# Altium PCB c8.pcbdoc
Units mil, origin at the board's own origin, x right, y up, seen from the top; angles counter-clockwise.
Board outline 3149.61 x 2598.43 mil, 2 copper layers (Top Layer, Bottom Layer); 16 components, 35 nets, 112 pads, 93 vias.
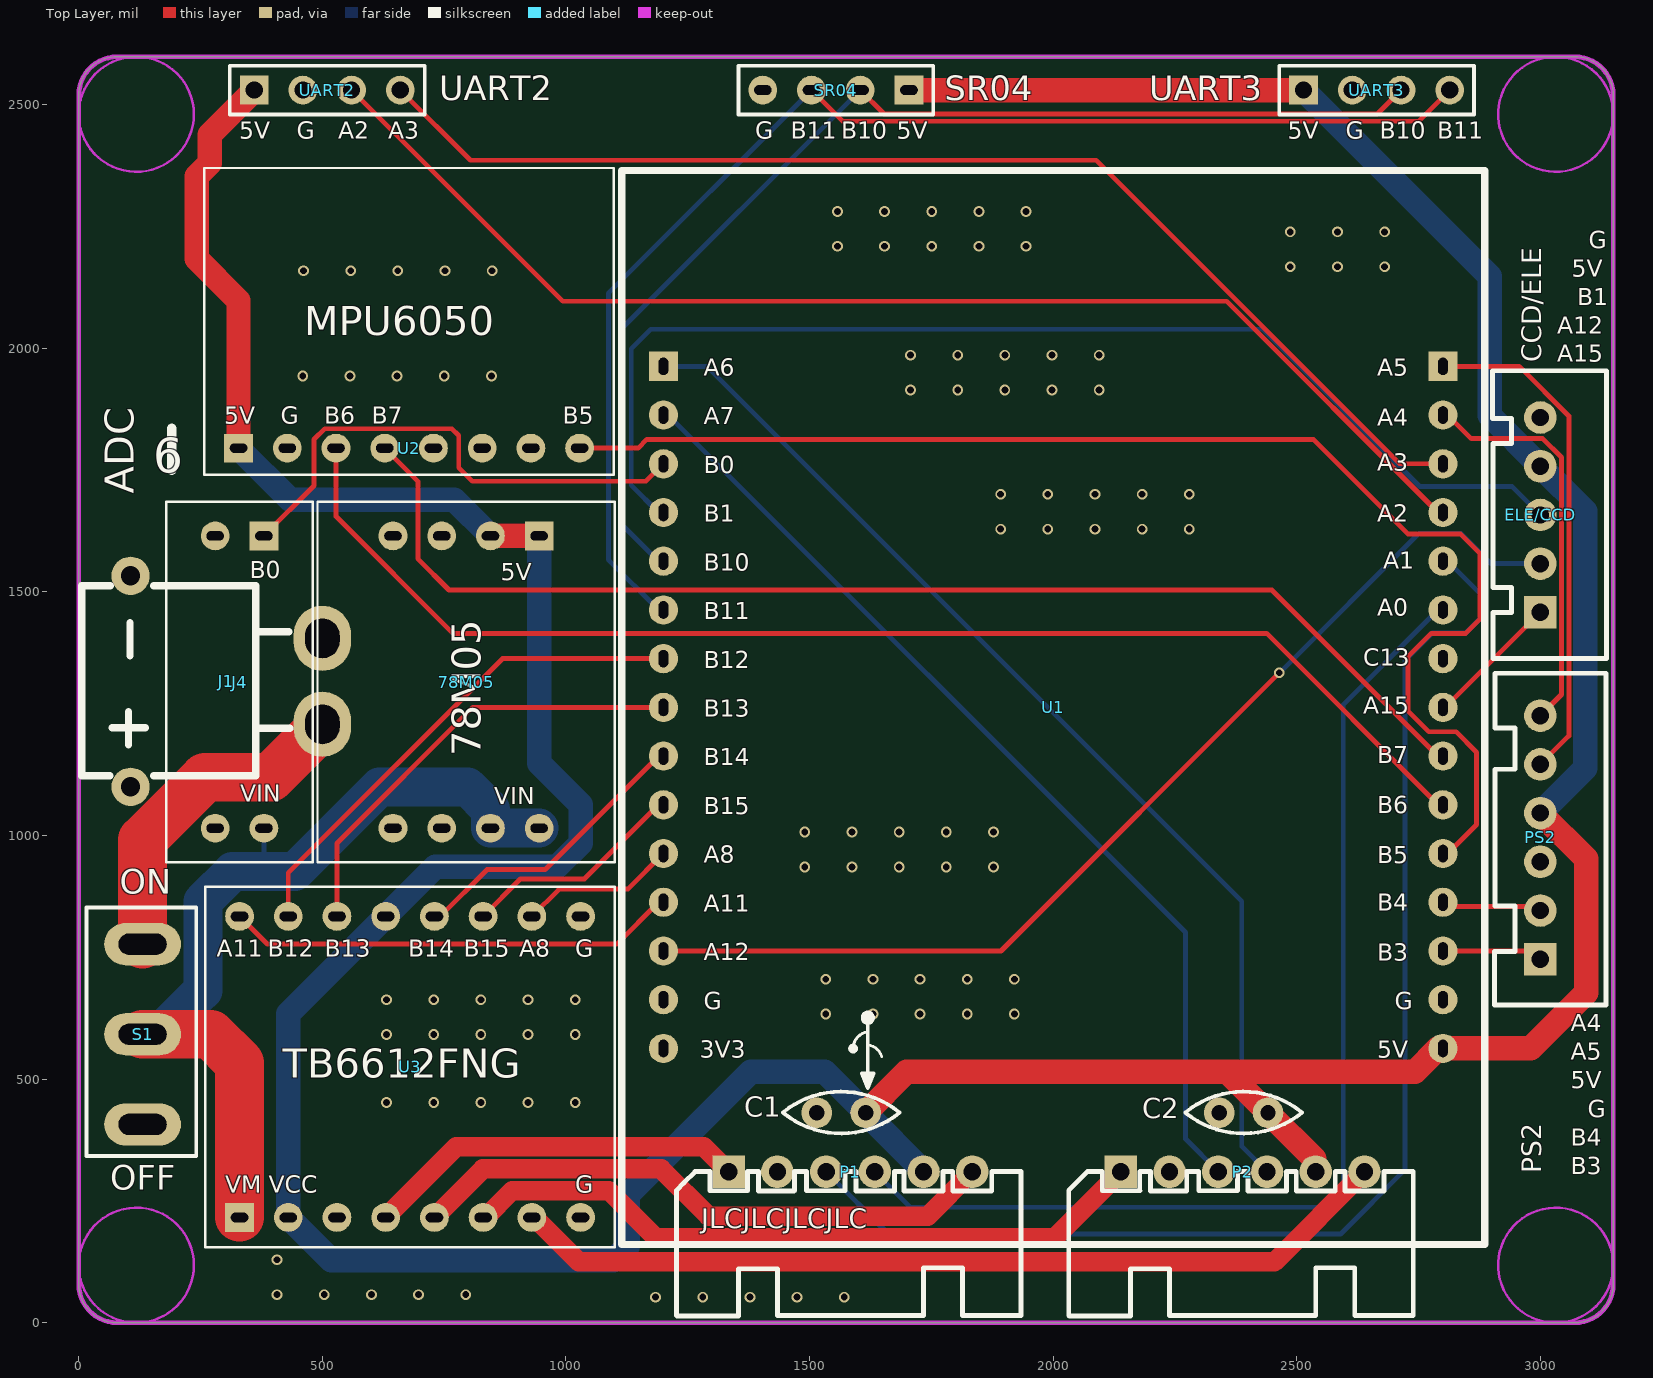
[diagram p0: Top Layer view]
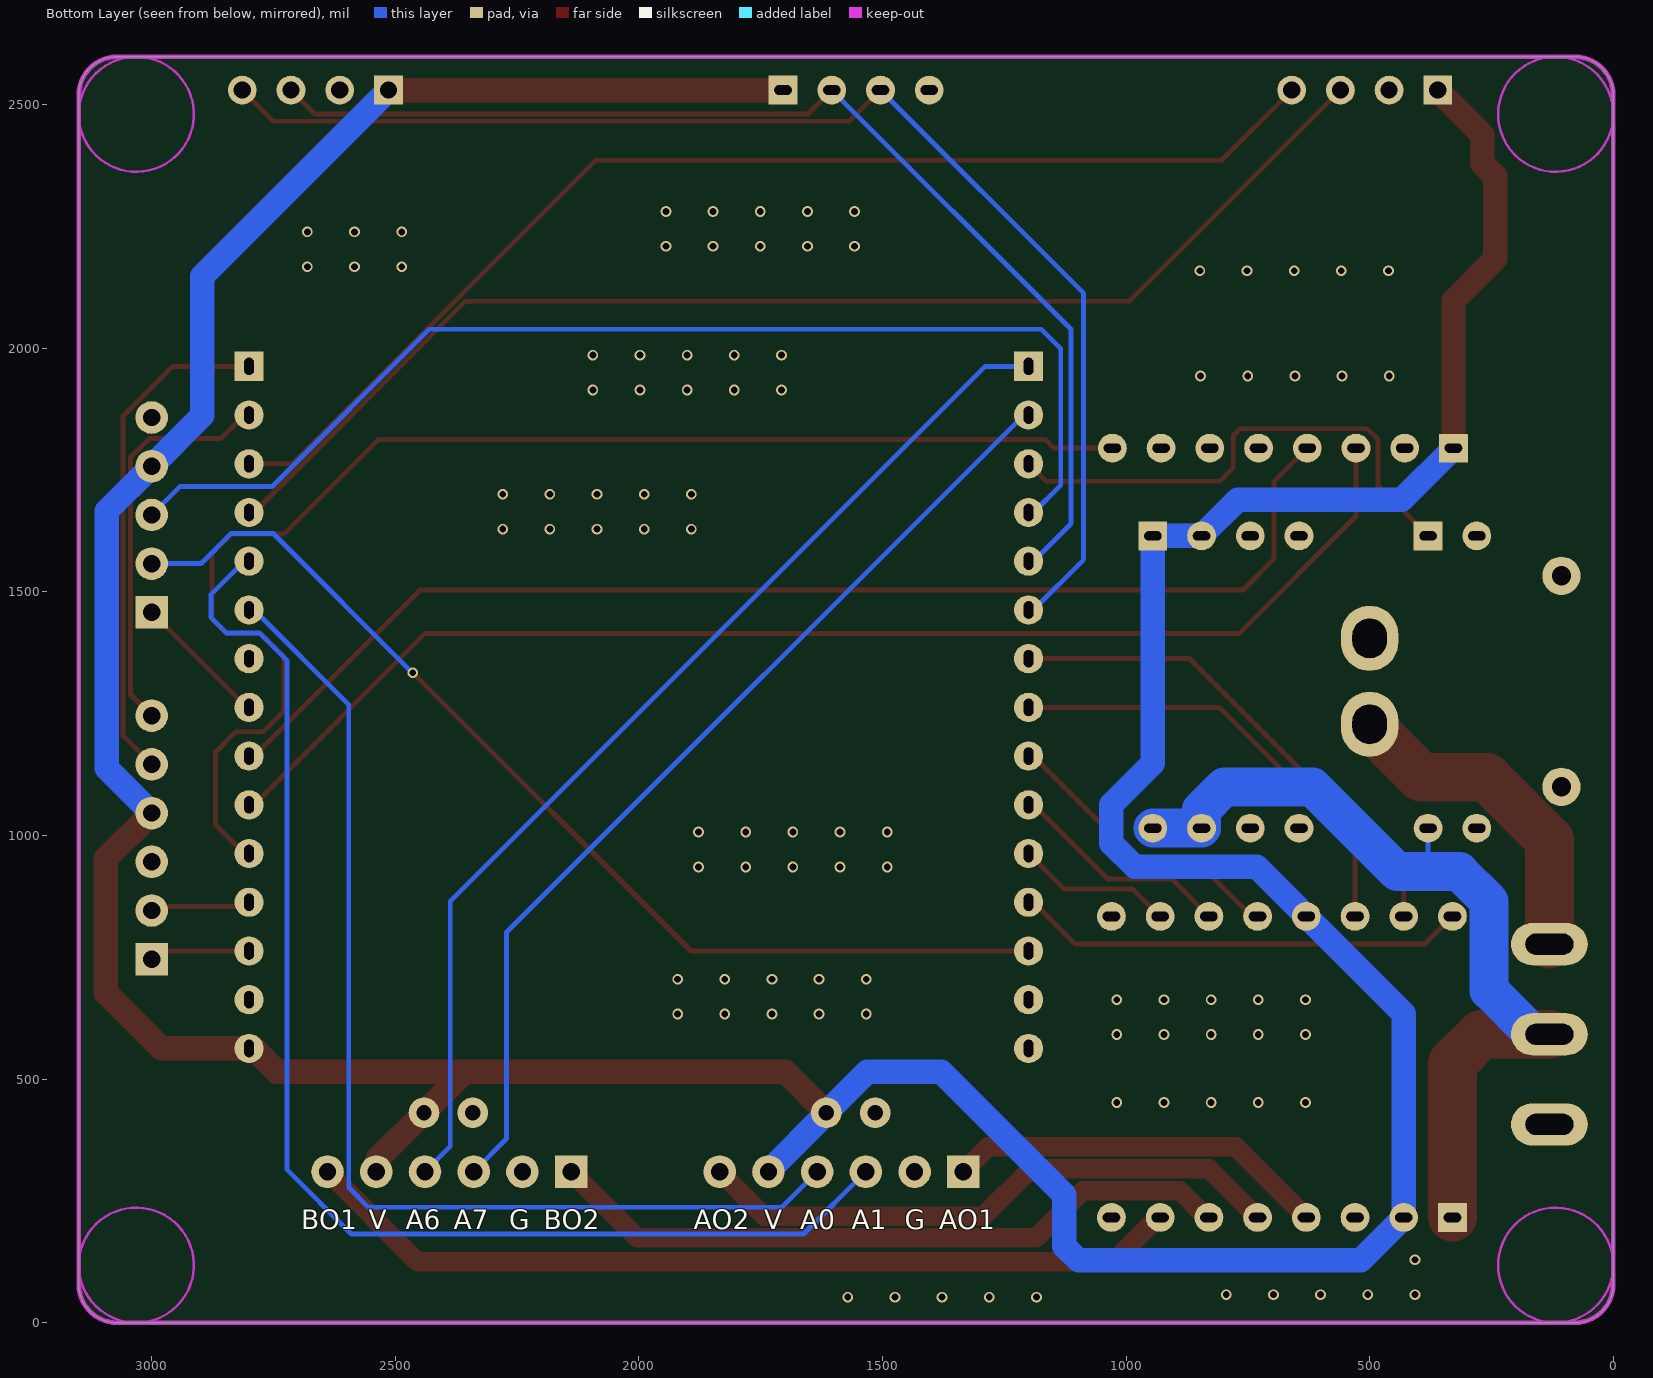
[diagram p1: Bottom Layer view, seen from below]

## Layer stack, top to bottom
Top Solder: solder mask 0.4, Solder Resist, Dk 3.5
Top Layer: signal copper 1.4
Dielectric 1: dielectric 12.6, FR-4, Dk 4.8
Bottom Layer: signal copper 1.4
Bottom Solder: solder mask 0.4, Solder Resist, Dk 3.5

## Board outline
0,78.74 0,2519.68 cw(c78.74,2519.68) 78.74,2598.43 3070.87,2598.43 cw(c3070.87,2519.68) 3149.61,2519.68 3149.61,78.74 cw(c3070.87,78.74) 3070.87,0 78.74,0 cw(c78.74,78.74)

## Design rules (kind name [scope] priority, off if disabled: settings)
AssemblyTestPointUsage [All] p0: scope1count=1 scope1_0_kind=Board scope1_0_value=Board scope2count=1 scope2_0_kind=Board scope2_0_value=Board commentlength=0
AssemblyTestpoint [All] p0: scope1count=1 scope1_0_kind=Board scope1_0_value=Board scope2count=1 scope2_0_kind=Board scope2_0_value=Board commentlength=0
Clearance Clearance_Polygon [All] p0 off: scope1count=1 scope1_0_kind=Board scope1_0_value=Board scope2count=1 scope2_0_kind=Board scope2_0_value=Board commentlength=48 gap=10 // Protel DXP Scope 1 Expression Was: InPolygon
Clearance [All] p0: scope1count=1 scope1_0_kind=Board scope1_0_value=Board scope2count=1 scope2_0_kind=Board scope2_0_value=Board commentlength=0 gap=5
Clearance Clearance_Polygon [InPolygon] p1: gap=10 ignorepadtopadclearanceinfootprint=FALSE
Clearance [All] p2: gap=5 ignorepadtopadclearanceinfootprint=FALSE except(0: Arc-Hole Track-Hole SMDPad-Hole THPad-Hole Via-Hole Fill-Hole Poly-Hole Region-Hole Text-Hole)
ComponentClearance [All] p0: scope1count=1 scope1_0_kind=Board scope1_0_value=Board scope2count=1 scope2_0_kind=Board scope2_0_value=Board commentlength=0 gap=10 collisioncheckmode=3
DiffPairsRouting [All] p0: scope1count=1 scope1_0_kind=Board scope1_0_value=Board scope2count=1 scope2_0_kind=Board scope2_0_value=Board commentlength=0
FabricationTestPointUsage [All] p0: scope1count=1 scope1_0_kind=Board scope1_0_value=Board scope2count=1 scope2_0_kind=Board scope2_0_value=Board commentlength=0 valid=0 allowmultiple=FALSE
FabricationTestpoint [All] p0: scope1count=1 scope1_0_kind=Board scope1_0_value=Board scope2count=1 scope2_0_kind=Board scope2_0_value=Board commentlength=0 side=3 testpointundercomponent=TRUE minsize=40 maxsize=100 preferedsize=60 minholesize=0 maxholesize=40 preferedholesize=32 testpointgrid=1
FanoutControl Fanout_BGA [All] p0 off: scope1count=1 scope1_0_kind=Board scope1_0_value=Board scope2count=1 scope2_0_kind=Board scope2_0_value=Board commentlength=69 // Protel DXP Scope 1 Expression Was: IsBGA   Fanout_BGA (Default Rule)
FanoutControl Fanout_LCC [All] p0 off: scope1count=1 scope1_0_kind=Board scope1_0_value=Board scope2count=1 scope2_0_kind=Board scope2_0_value=Board commentlength=69 // Protel DXP Scope 1 Expression Was: IsLCC   Fanout_LCC (Default Rule)
FanoutControl Fanout_SOIC [All] p0 off: scope1count=1 scope1_0_kind=Board scope1_0_value=Board scope2count=1 scope2_0_kind=Board scope2_0_value=Board commentlength=71 // Protel DXP Scope 1 Expression Was: IsSOIC   Fanout_SOIC (Default Rule)
FanoutControl Fanout_Small [All] p0 off: scope1count=1 scope1_0_kind=Board scope1_0_value=Board scope2count=1 scope2_0_kind=Board scope2_0_value=Board commentlength=84 // Protel DXP Scope 1 Expression Was: (CompPinCount < 5)   Fanout_Small (Default Rule)
FanoutControl Fanout_Default [All] p0: scope1count=1 scope1_0_kind=Board scope1_0_value=Board scope2count=1 scope2_0_kind=Board scope2_0_value=Board commentlength=30 // Fanout_Default (Default Rule)
Height [All] p0: scope1count=1 scope1_0_kind=Board scope1_0_value=Board scope2count=1 scope2_0_kind=Board scope2_0_value=Board commentlength=0
HoleSize [All] p0: scope1count=1 scope1_0_kind=Board scope1_0_value=Board scope2count=1 scope2_0_kind=Board scope2_0_value=Board commentlength=0 absolutevalues=TRUE maxlimit=200 minlimit=1 maxpercent=80.000 minpercent=20.000
HoleSize [All] p1: absolutevalues=TRUE maxlimit=200 minlimit=1 maxpercent=80.000 minpercent=20.000
HoleToHoleClearance [All] p0: scope1count=1 scope1_0_kind=Board scope1_0_value=Board scope2count=1 scope2_0_kind=Board scope2_0_value=Board commentlength=0
HoleToHoleClearance [All] p1: gap=5 allowstackedmicrovias=TRUE
LayerPairs [All] p0: scope1count=1 scope1_0_kind=Board scope1_0_value=Board scope2count=1 scope2_0_kind=Board scope2_0_value=Board commentlength=0 enforce=TRUE
MinimumSolderMaskSliver [All] p0: scope1count=1 scope1_0_kind=Board scope1_0_value=Board scope2count=1 scope2_0_kind=Board scope2_0_value=Board commentlength=0
MinimumSolderMaskSliver [All] p1: minsoldermaskwidth=5
NetAntennae [All] p0: scope1count=1 scope1_0_kind=Board scope1_0_value=Board scope2count=1 scope2_0_kind=Board scope2_0_value=Board commentlength=0
PasteMaskExpansion [All] p0: scope1count=1 scope1_0_kind=Board scope1_0_value=Board scope2count=1 scope2_0_kind=Board scope2_0_value=Board commentlength=0 expansion=5
PasteMaskExpansion [All] p1: expansion=5
PlaneClearance [All] p0: scope1count=1 scope1_0_kind=Board scope1_0_value=Board scope2count=1 scope2_0_kind=Board scope2_0_value=Board commentlength=0 clearance=10
PlaneClearance [All] p1: clearance=10
PlaneConnect [All] p0: scope1count=1 scope1_0_kind=Board scope1_0_value=Board scope2count=1 scope2_0_kind=Board scope2_0_value=Board commentlength=0 planeconnectstyle=Relief reliefexpansion=20 reliefentries=4 reliefconductorwidth=10 reliefairgap=5
PlaneConnect [All] p1: planeconnectstyle=Relief reliefexpansion=20 reliefentries=4 reliefconductorwidth=10 reliefairgap=5
PolygonConnect [All] p0: scope1count=1 scope1_0_kind=Board scope1_0_value=Board scope2count=1 scope2_0_kind=Board scope2_0_value=Board commentlength=0 connectstyle=Relief reliefconductorwidth=10 reliefentries=4 polygonreliefangle="90 Angle"
PolygonConnect PolygonConnect_J1 [All] p0 off: scope1count=1 scope1_0_kind=Board scope1_0_value=Board scope2count=1 scope2_0_kind=Board scope2_0_value=Board commentlength=78 connectstyle=Direct reliefconductorwidth=20 reliefentries=4 polygonreliefangle="90 Angle" // Protel DXP Scope 1 Expression Was: InComponent('J1')  OR InComponent('U3')
PolygonConnect PolygonConnect_Via [All] p0 off: scope1count=1 scope1_0_kind=Board scope1_0_value=Board scope2count=1 scope2_0_kind=Board scope2_0_value=Board commentlength=61 connectstyle=Direct reliefconductorwidth=10 reliefentries=4 polygonreliefangle="90 Angle" // Protel DXP Scope 1 Expression Was: IsVia OR InNet('BAT+')
PolygonConnect PolygonConnect_Via [IsVia OR InNet('BAT+')] p1: connectstyle=Direct reliefconductorwidth=10 reliefentries=4 polygonreliefangle="90 Angle" airgapwidth=10
PolygonConnect PolygonConnect_J1 [InComponent('J1')  OR InComponent('U3')] p2: connectstyle=Direct reliefconductorwidth=20 reliefentries=4 polygonreliefangle="90 Angle" airgapwidth=10
PolygonConnect [All] p3: connectstyle=Relief reliefconductorwidth=10 reliefentries=4 polygonreliefangle="90 Angle" airgapwidth=15
RoutingCorners [All] p0: scope1count=1 scope1_0_kind=Board scope1_0_value=Board scope2count=1 scope2_0_kind=Board scope2_0_value=Board commentlength=0 cornerstyle=45-Degree minsetback=100 maxsetback=100
RoutingLayers [All] p0: scope1count=1 scope1_0_kind=Board scope1_0_value=Board scope2count=1 scope2_0_kind=Board scope2_0_value=Board commentlength=0 top layer=Automatic bottom layer=Automatic
RoutingPriority [All] p0: scope1count=1 scope1_0_kind=Board scope1_0_value=Board scope2count=1 scope2_0_kind=Board scope2_0_value=Board commentlength=0
RoutingTopology [All] p0: scope1count=1 scope1_0_kind=Board scope1_0_value=Board scope2count=1 scope2_0_kind=Board scope2_0_value=Board commentlength=0 topology=Shortest
RoutingVias [All] p0: scope1count=1 scope1_0_kind=Board scope1_0_value=Board scope2count=1 scope2_0_kind=Board scope2_0_value=Board commentlength=0 holewidth=22 width=20 viastyle="Through Hole" minholewidth=12 minwidth=20 maxholewidth=50 maxwidth=50
RoutingVias [All] p1: holewidth=22 width=20 viastyle="Through Hole" minholewidth=12 minwidth=20 maxholewidth=50 maxwidth=50
ShortCircuit [All] p0: scope1count=1 scope1_0_kind=Board scope1_0_value=Board scope2count=1 scope2_0_kind=Board scope2_0_value=Board commentlength=0 allowed=FALSE
SilkToBoardRegionClearance [All] p0 off: scope1count=1 scope1_0_kind=Board scope1_0_value=Board scope2count=1 scope2_0_kind=Board scope2_0_value=Board commentlength=0
SilkToBoardRegionClearance [All] p1 off:
SilkToSilkClearance [All] p0 off: scope1count=1 scope1_0_kind=Board scope1_0_value=Board scope2count=1 scope2_0_kind=Board scope2_0_value=Board commentlength=0
SilkToSilkClearance [All] p1 off: silktosilkclearance=5
SilkToSolderMaskClearance [All] p0 off: scope1count=1 scope1_0_kind=Board scope1_0_value=Board scope2count=1 scope2_0_kind=Board scope2_0_value=Board commentlength=44 // Protel DXP Scope 1 Expression Was: IsPad
SilkToSolderMaskClearance [IsPad] p1 off: minsilkscreentomaskgap=5 clearancetoexposedcopper=TRUE
SolderMaskExpansion [All] p0: scope1count=1 scope1_0_kind=Board scope1_0_value=Board scope2count=1 scope2_0_kind=Board scope2_0_value=Board commentlength=0 expansion=4
SolderMaskExpansion [All] p1: expansion=4 istentingtop=FALSE
UnRoutedNet [All] p0: scope1count=1 scope1_0_kind=Board scope1_0_value=Board scope2count=1 scope2_0_kind=Board scope2_0_value=Board commentlength=0
UnpouredPolygon [All] p0: scope1count=1 scope1_0_kind=Board scope1_0_value=Board scope2count=1 scope2_0_kind=Board scope2_0_value=Board commentlength=0
Width [All] p0: scope1count=1 scope1_0_kind=Board scope1_0_value=Board scope2count=1 scope2_0_kind=Board scope2_0_value=Board commentlength=0 maxlimit=100 minlimit=5 preferedwidth=10
Width [All] p1: maxlimit=100 minlimit=5 preferedwidth=10
21 further rules are at their usual default settings.

## Components (designator, comment, footprint, x,y, rotation, side; value= is the part's Value field where it differs from the comment)
78M05 "78M05" MP2259_M0 795,1315 r270 top locked
C1 "104" "CC 2.54*5" 1615,431 r180 top
C2 "104" "CC 2.54*5" 2441,431 r180 top
ELE/CCD "Header 5" XH2.54-LI-5P 3000,1658 r90 top locked
J1 "Header 2" XT30-PW-M 500,1316.46 r90 top locked
J4 "ADC模块" ADC_A0 330,1315 r270 top locked
P1 "Header 6" XH2.54-WI-6P 1584,310 r0 top locked
P2 "Header 6" XH2.54-WI-6P 2389,310 r0 top locked
PS2 "Header 6" XH2.54-LI-6P 3000,996 r90 top locked
S1 "SW-SPDT" "SW - LI" 131,777 r0 top locked
SR04 "Header 4" HDR1X4#1 1704,2530 r180 top
U1 "Stm32_F103C8T6_F" Stm32_F103C8T6_F 1114.5,160.36 r0 top locked
U2 "6050模块-GY521" MPU6050_GY521 678,2055.09 r90 top locked
U3 "TB6612" TB6612模块 680,525 r90 top locked
UART2 "Header 4" HDR1X4#2 360.04,2530 r0 top
UART3 "Header 4" HDR1X4#2 2514,2530 r0 top

## Footprints (in the part's own frame and the unit in brackets; to place one, negate y for a bottom-side part, rotate by r counter-clockwise, add the part's x,y. Pads: shape width x height; smd on the part's side, far side on the other; paste and mask are expansions set on the pad)
ADC_A0 [mm]
  rect 1.5x1.5 hole 0.48 slot 0.9 at 90 deg: 1(-7.62,1.27)
  round 1.5 hole 0.48 slot 0.9 at 90 deg: 2(-7.62,-1.27) 3(7.62,-1.27) 4(7.62,1.27)
  silkscreen extent -9.4,-3.81 9.4,3.81
"CC 2.54*5" [mm] "直插型小瓷片电容"
  round 1.6 hole 0.8: 1(0,0) 2(2.54,0)
  silkscreen extent -1.78,-1.1 4.32,1.08
HDR1X4#1 [mm] "Connector; Header; 4 Position"
  rect 1.5x1.5 hole 0.5 slot 0.9 at 0 deg: 1(0,0)
  round 1.5 hole 0.5 slot 0.9 at 0 deg: 2(2.54,0) 3(5.08,0) 4(7.62,0)
  silkscreen extent -1.27,-1.27 8.89,1.27
HDR1X4#2 [mm] "Connector; Header; 4 Position"
  rect 1.5x1.5 hole 0.9: 1(0,0)
  round 1.5 hole 0.9: 2(2.54,0) 3(5.08,0) 4(7.62,0)
  silkscreen extent -1.27,-1.27 8.89,1.27
MP2259_M0 [mm]
  round 1.5 hole 0.48 slot 0.9 at 90 deg: 1(-7.62,1.27) 2(-7.62,-3.81) 2(-7.62,-1.27) 3(7.62,-3.81) 3(7.62,-1.27) 4(7.62,1.27) 4(7.62,3.81)
  rect 1.5x1.5 hole 0.48 slot 0.9 at 90 deg: 1(-7.62,3.81)
  silkscreen extent -9.4,-7.75 9.4,7.75
MPU6050_GY521 [mm]
  rect 1.5x1.5 hole 0.48 slot 0.9 at 90 deg: 1(-6.604,8.89)
  round 1.5 hole 0.48 slot 0.9 at 90 deg: 2(-6.604,6.35) 3(-6.604,3.81) 4(-6.604,1.27) 5(-6.604,-1.27) 6(-6.604,-3.81) 7(-6.604,-6.35) 8(-6.604,-8.89)
  silkscreen extent -8,-10.67 8,10.67
Stm32_F103C8T6_F [mil]
  rect 60x60 hole 19.68 slot 35.43 at 90 deg: 1(85.5,1802.64) 30(1685.5,1802.64)
  round 60 hole 19.68 slot 35.43 at 90 deg: 2(85.5,1702.64) 3(85.5,1602.64) 4(85.5,1502.64) 5(85.5,1402.64) 6(85.5,1302.64) 7(85.5,1202.64) 8(85.5,1102.64) 9(85.5,1002.64) 10(85.5,902.64) 11(85.5,802.64) 12(85.5,702.64) 13(85.5,602.64) 14(85.5,502.64) 15(85.5,402.64) 16(1685.5,402.64) 17(1685.5,502.64) 18(1685.5,602.64) 19(1685.5,702.64) 20(1685.5,802.64) 21(1685.5,902.64) 22(1685.5,1002.64) 23(1685.5,1102.64) 24(1685.5,1202.64) 25(1685.5,1302.64) 26(1685.5,1402.64) 27(1685.5,1502.64) 28(1685.5,1602.64) 29(1685.5,1702.64)
  silkscreen extent 0,0 1772,2205
"SW - LI" [mm]
  oval 4x2.2 hole 1.1 slot 2.5 at 0 deg: 1(0,0) 2(0,-4.699) 3(0,-9.398)
  silkscreen extent -2.92,-11.05 2.79,1.91
TB6612模块 [mm]
  rect 1.5x1.5 hole 0.5 slot 0.9 at 90 deg: 1(-7.849,8.89)
  round 1.5 hole 0.5 slot 0.9 at 90 deg: 2(-7.849,6.35) 3(-7.849,3.81) 4(-7.849,1.27) 5(-7.849,-1.27) 6(-7.849,-3.81) 7(-7.849,-6.35) 8(-7.849,-8.89) 9(7.849,-8.89) 10(7.849,-6.35) 11(7.849,-3.81) 12(7.849,-1.27) 13(7.849,1.27) 14(7.849,3.81) 15(7.849,6.35) 16(7.849,8.89)
  silkscreen extent -9.4,-10.67 9.4,10.67
XH2.54-LI-5P [mm] "接插件，5P"
  rect 1.7x1.7 hole 0.9: 1(-5.08,0)
  round 1.7 hole 0.9: 2(-2.54,0) 3(0,0) 4(2.54,0) 5(5.08,0)
  silkscreen extent -7.48,-3.45 7.52,2.49
XH2.54-LI-6P [mm] "接插件，6P"
  rect 1.7x1.7 hole 0.9: 1(-6.35,0)
  round 1.7 hole 0.9: 2(-3.81,0) 3(-1.27,0) 4(1.27,0) 5(3.81,0) 6(6.35,0)
  silkscreen extent -8.74,-3.43 8.56,2.39
XH2.54-WI-6P [mm] "接插件，6P"
  rect 1.7x1.7 hole 0.9: 1(-6.35,0)
  round 1.7 hole 0.9: 2(-3.81,0) 3(-1.27,0) 4(1.27,0) 5(3.81,0) 6(6.35,0)
  silkscreen extent -9.07,-7.53 8.89,0
XT30-PW-M [mm]
  round 2 hole 1: 0(-5.5,10) 0(5.5,10)
  oval 3.4x3 hole 1.8 slot 2.06 at 0 deg: 1(2.24,0) 2(-2.24,0)
  silkscreen extent -4.93,1.7 4.98,12.55

## Part data
78M05: library part MP2259模块
C1 C2: library part Cap, "Capacitor"
ELE/CCD: "Header, 5-Pin"
J1: "Header, 2-Pin"
J4: library part "Header 2X2", "Header, 2-Pin, Dual row"
P1 P2 PS2: "Header, 6-Pin"
S1: "SPDT Subminiature Toggle Switch, Right Angle Mounting, Vertical Actuation"
SR04 UART2 UART3: "Header, 4-Pin"
U3: library part DAYU_TB6612

## Via types
v1: diameter 22, hole 14, Top Layer to Bottom Layer, tented both sides, 93 vias

## Nets (pads, with @x,y where several pads share a name; then routed paths per layer and width w, separated by ;. In a path a pad name is that pad's centre, name@x,y a point inside that pad or via, vN(x,y) a via of type N, cw(c..) or ccw(c..) an arc to the next point about the centre after c; other vN are vias at no path point)
3V3: U1.15
5V: 78M05.1 C1.1 C2.1 ELE/CCD.4 P1.5 P2.5 PS2.4 SR04.1 U1.16 U2.1 U3.2 U3.13 UART2.1 UART3.1 | length 9929.9
  Top Layer w50: U2.1 328,2098 242,2184 242,2353 268.72,2379.72 268.72,2438.68 UART2.1 ; 78M05.1@845,1615 78M05.1@945,1615 ; C1.1 1699,515 2357,515 ; SR04.1 UART3.1 ; P2.5 2535.76,313.24 2535.76,336.24 C2.1 2357,515 ; PS2.4 3094,952 3094,677 2980,563 U1.16 2790.71,563 2742.71,515 2357,515
  Bottom Layer w50: U2.1 434.09,1689 771,1689 845,1615 945,1615 945,1148 1030,1063 1030,984 981.53,935.53 731.53,935.53 U3.13 ; U3.13@630,834.36 430,634.36 430,216.36 518.36,128 1097.71,128 1127,157.29 1127,263 1379,515 1531,515 C1.1 1615,430 1734,311 P1.5 ; UART3.1 2896,2148 2896,1862 ELE/CCD.4 3092,1666 3092,1138 PS2.4
AOUT1: P1.1 U3.4 | length 784.9
  Top Layer w40: U3.4@630,216.36 774.53,360.89 1283.11,360.89 P1.1
AOUT2: P1.6 U3.5 | length 1223.1
  Top Layer w40: U3.5@730,216.36 829.53,315.89 1195.4,315.89 1292.29,219 1743,219 P1.6
BAT+: J1.2 S1.1 | length 683.1
  Top Layer w100: S1.1 131,991.17 259.25,1119.42 394.12,1119.42 500,1225.3 J1.2
BOUT1: P2.6 U3.7 | length 1823.5
  Top Layer w40: U3.7@930,216.36 935.16,216.36 1026.52,125 2454,125 P2.6
BOUT2: P2.1 U3.6 | length 1428.1
  Top Layer w40: U3.6@830,216.36 835.16,216.36 889.68,270.89 1088.11,270.89 1185,174 2003,174 P2.1
GND: 78M05.2 78M05.3 C1.2 C2.2 ELE/CCD.5 J1.1 J4.2 J4.3 P1.2 P2.2 PS2.3 SR04.4 U1.14 U1.17 U2.2 U3.3 U3.8 U3.9 UART2.2 UART3.2
  other v1: 1184,52.53 1280.79,52.53 1377.59,52.53 1474.38,52.53 1571.17,52.53 407.06,57.65 503.85,57.65 600.64,57.65 697.43,57.65 794.22,57.65 407.06,129.12 631.77,451.93 728.56,451.93 825.35,451.93 922.14,451.93 1018.93,451.93 631.77,591.53 728.56,591.53 825.35,591.53 922.14,591.53 1018.93,591.53 1533.25,633.53 1630.04,633.53 1726.83,633.53 1823.62,633.53 1920.42,633.53 631.77,663 728.56,663 825.35,663 922.14,663 1018.93,663 1533.25,705 1630.04,705 1726.83,705 1823.62,705 1920.42,705 1490.25,935.53 1587.04,935.53 1683.83,935.53 1780.62,935.53 1877.42,935.53 1490.25,1007 1587.04,1007 1683.83,1007 1780.62,1007 1877.42,1007 1892.25,1628.87 1989.04,1628.87 2085.83,1628.87 2182.62,1628.87 2279.42,1628.87 1892.25,1700.35 1989.04,1700.35 2085.83,1700.35 2182.62,1700.35 2279.42,1700.35 1707.25,1914.53 1804.04,1914.53 1900.83,1914.53 1997.62,1914.53 2094.42,1914.53 459.83,1943 556.63,1943 653.42,1943 750.21,1943 847,1943 1707.25,1986 1804.04,1986 1900.83,1986 1997.62,1986 2094.42,1986 461.34,2159.04 558.13,2159.04 654.93,2159.04 751.72,2159.04 848.51,2159.04 2486.83,2167.53 2583.62,2167.53 2680.42,2167.53 1557.25,2209.53 1654.04,2209.53 1750.83,2209.53 1847.62,2209.53 1944.42,2209.53 2486.83,2239 2583.62,2239 2680.42,2239 1557.25,2281 1654.04,2281 1750.83,2281 1847.62,2281 1944.42,2281
PA0: P1.4 U1.25 | length 2284.6
  Bottom Layer w10: P1.4 1707,237 2555,237 2595.54,277.54 2595.54,1268.54 2790,1463 U1.25
PA1: P1.3 U1.26 | length 2687.3
  Bottom Layer w10: P1.3 1662,182 2590,182 2722,314 2722,1359 2779,1416 2847,1416 2878,1447 2878,1495 2810,1563 U1.26
PA2: U1.27 UART2.3 | length 2598.5
  Top Layer w10: UART2.3@560.47,2529.57 993.45,2096.59 2356.41,2096.59 2790,1663 U1.27
PA3: U1.28 UART2.4 | length 2457.7
  Top Layer w10: UART2.4 804.04,2386 2088.21,2386 2711.21,1763 U1.28
PA4: PS2.6 U1.29 | length 827.5
  Top Layer w10: U1.29 2810,1863 2858.46,1814.54 3004.93,1814.54 3043.46,1776 3043.46,1289.46 PS2.6
PA5: PS2.5 U1.30 | length 1039.9
  Top Layer w10: U1.30 2956.47,1963 3058.46,1861 3058.46,1204.46 PS2.5
PA6: P2.4 U1.1 | length 2218.3
  Bottom Layer w10: U1.1 1289,1963 2387,865 2387,362 P2.4
PA7: P2.3 U1.2 | length 2030.6
  Bottom Layer w10: U1.2 1210,1863 2272,801 2272,377 P2.3
PA8: U1.11 U3.10 | length 323.4
  Top Layer w10: U3.10 986,890 1127,890 U1.11
PA11: U1.12 U3.16 | length 929.4
  Top Layer w10: U3.16@330,834.36 387.36,777 1104,777 1190,863 U1.12
PA12: ELE/CCD.2 U1.13 | length 2181.7
  Top Layer w10: U1.13 1893,763 v1(2464,1334)
  Bottom Layer w10: v1@2463,1334 v1(2464,1334) 2465,1334 2751,1620 2836.8,1620 2898.8,1558 ELE/CCD.2
PA15: ELE/CCD.1 U1.23 | length 280.8
  Top Layer w10: U1.23 2805,1263 ELE/CCD.1
PB0: J4.1 U1.3 | length 1065.1
  Top Layer w10: J4.1 482.93,1717.93 482.93,1813 504.93,1835 766,1835 780,1821 780,1755 807.91,1727.09 1164.09,1727.09 U1.3
PB1: ELE/CCD.3 U1.4 | length 2409.6
  Bottom Layer w10: U1.4 1190,1663 1134,1719 1134,1999 1174,2039 2430,2039 2753,1716 2942,1716 ELE/CCD.3
PB3: PS2.1 U1.18 | length 207
  Top Layer w10: U1.18 2983,763 PS2.1
PB4: PS2.2 U1.19 | length 207
  Top Layer w10: U1.19 2808.5,854.5 2991.5,854.5 PS2.2
PB5: U1.20 U2.8 | length 2796.8
  Top Layer w10: U2.8 1148.09,1795.09 1166,1813 2534,1813 2728,1619 2836,1619 2876,1579 2876,1444 2847,1415 2776,1415 2728,1367 2728,1256.21 2771.21,1213 2827,1213 2869,1171 2869,1022 2810,963 U1.20
PB6: U1.21 U2.3 | length 2657.3
  Top Layer w10: U2.3 528,1655 768,1415 2438,1415 2790,1063 U1.21
PB7: U1.22 U2.4 | length 2527
  Top Layer w10: U2.4 696,1727.09 696,1568 760,1504 2449,1504 2790,1163 U1.22
PB10: SR04.2 U1.5 UART3.3 | length 2362.9
  Top Layer w10: SR04.2 1653,2481 2665,2481 UART3.3
  Bottom Layer w10: U1.5 1190,1563 1113,1640 1113,2039 SR04.2
PB11: SR04.3 U1.6 UART3.4 | length 2654.8
  Top Layer w10: SR04.3@1504.43,2529.57 1568,2466 2750,2466 UART3.4
  Bottom Layer w10: U1.6 1190,1463 1087,1566 1087,2113 SR04.3
PB12: U1.7 U3.15 | length 1041.4
  Top Layer w10: U3.15 430,923.29 869.71,1363 U1.7
PB13: U1.8 U3.14 | length 935.6
  Top Layer w10: U3.14 530,984 809,1263 U1.8
PB14: U1.9 U3.12 | length 606.3
  Top Layer w10: U3.12 742,834 838,930 957,930 1190,1163 U1.9
PB15: U1.10 U3.11 | length 464.7
  Top Layer w10: U3.11@830,834.36 906.64,911 1038,911 1190,1063 U1.10
PC13: U1.24
VDD: 78M05.4 J4.4 S1.2 U3.1 | length 1818.3
  Top Layer w100: S1.2 271,592 330,533 U3.1@330,216.36
  Bottom Layer w10: 379.63,925.68 380,926.04 J4.4
  Bottom Layer w80: S1.2 164.64,592 254.74,682.1 254.74,864.5 315.92,925.68 379.63,925.68 443.35,925.68 617.6,1099.93 798.14,1099.93 845,1053.07 845,1015 78M05.4@945,1015
pads on no net: J1.0 S1.3 U2.5 U2.6 U2.7

## Polygon pours and split planes (outlines as drawn)
GND on Top Layer "GND_L01_P002" (solid, pour order 2): 0,78.74 0,2519.68 cw(c78.74,2519.68) 78.74,2598.43 3070.87,2598.43 cw(c3070.87,2519.68) 3149.61,2519.68 3149.61,78.74 cw(c3070.87,78.74) 3070.87,0 78.74,0 cw(c78.74,78.74)
GND on Bottom Layer "GND_L02_P001" (solid, remove dead copper, pour order 1): 0,78.74 0,2519.68 cw(c78.74,2519.68) 78.74,2598.43 3070.87,2598.43 cw(c3070.87,2519.68) 3149.61,2519.68 3149.61,78.74 cw(c3070.87,78.74) 3070.87,0 78.74,0 cw(c78.74,78.74)

## Keep-outs
Keep-Out Layer:
  circle w5: c118.11,2480.32 r118.11
  circle w5: c118.11,118.11 r118.11
  circle w5: c3031.5,2480.32 r118.11
  circle w5: c3031.5,118.11 r118.11
  lines w10: 0,78.74 ccw(c78.74,78.74) 78.74,0 3070.87,0 ccw(c3070.87,78.74) 3149.61,78.74 3149.61,2519.68 ccw(c3070.87,2519.68) 3070.87,2598.43 78.74,2598.43 ccw(c78.74,2519.68) 0,2519.68 0,78.74

## Silkscreen, mask and mechanical layers (free items; w line width, h text height)
Top Overlay:
  lines w20: 191,1750 191,1835.69
  text "UART2" at 740,2509.6 h50
  text "SR04" at 1778,2509.6 h50
  text "UART3" at 2197,2509.6 h50
  text "5V" at 328.95,2430 h35
  text "G" at 447.48,2430 h35
  text "A2" at 533,2430 h35
  text "A3" at 635,2430 h35
  text "G" at 1389,2430 h35
  text "B11" at 1461,2430 h35
  text "B10" at 1565,2430 h35
  text "5V" at 1679,2430 h35
  text "5V" at 2481.88,2430 h35
  text "G" at 2600.4,2430 h35
  text "B10" at 2670.66,2430 h35
  text "B11" at 2787.92,2430 h35
  text "G" at 3098.98,2205 h35
  text "5V" at 3063.99,2146.75 h35
  text "B1" at 3075.65,2088.5 h35
  text "A12" at 3034.83,2030.25 h35
  text "MPU6050" at 463,2027 h60
  text "A15" at 3034.83,1972 h35
  text "CCD/ELE" at 3001.4,1971 h40 r90
  text "5V" at 298.92,1845.42 h35
  text "G" at 415,1845.42 h35
  text "B6" at 503.81,1845.42 h35
  text "B7" at 601.79,1845.42 h35
  text "B5" at 992.92,1845.42 h35
  text "6" at 153.04,1720.69 h120
  text "ADC" at 113.19,1701.28 h60 r90
  text "B0" at 350.92,1528 h35
  text "5V" at 866,1524 h35
  text "78M05" at 825.35,1163 h60 r90
  text "VIN" at 331.87,1068.86 h35
  text "VIN" at 853,1064 h35
  text "ON" at 84,880 h50
  text "A11" at 283.19,751.49 h35
  text "B12" at 388.03,751.49 h35
  text "B13" at 505,751.49 h35
  text "B14" at 676,751.49 h35
  text "B15" at 790,751.49 h35
  text "A8" at 904,751.49 h35
  text "G" at 1019.18,751.49 h35
  text "A4" at 3062.11,597.98 h35
  text "A5" at 3062.11,539.38 h35
  text "TB6612FNG" at 419,503 h60
  text "5V" at 3062.11,480.79 h35
  text "G" at 3097.1,422.19 h35
  text "B4" at 3062.11,363.6 h35
  text "PS2" at 3001.4,307 h40 r90
  text "B3" at 3062.11,305 h35
  text "OFF" at 65,273 h50
  text "VM" at 300.19,266.94 h35
  text "VCC" at 390,266.94 h35
  text "G" at 1019.37,266.94 h35
  text "JLCJLCJLCJLC" at 1278,194 h40
Bottom Overlay:
  text "AO1" at 1383,191.91 h40
  text "G" at 1454,191.91 h40
  text "A1" at 1563,191.91 h40
  text "A0" at 1669,191.91 h40
  text "V" at 1743,191.91 h40
  text "AO2" at 1887,191.91 h40
  text "BO2" at 2195,191.91 h40
  text "G" at 2266,191.91 h40
  text "A7" at 2380,191.91 h40
  text "A6" at 2478,191.91 h40
  text "V" at 2554,191.91 h40
  text "BO1" at 2693,191.91 h40
Mechanical 1:
  circle w5: c3031.5,2480.32 r62.99
  circle w5: c3031.5,118.11 r62.99
  circle w5: c118.11,2480.32 r62.99
  circle w5: c118.11,118.11 r62.99
  lines w5: 0,78.74 ccw(c78.74,78.74) 78.74,0 3070.87,0 ccw(c3070.87,78.74) 3149.61,78.74 3149.61,2519.68 ccw(c3070.87,2519.68) 3070.87,2598.43 78.74,2598.43 ccw(c78.74,2519.68) 0,2519.68 0,78.74

## Text inside footprints (layer, text, board x,y; h text height)
U1: Top Overlay "A6" at 1282.95,1943.95 h35; Top Overlay "A7" at 1282.95,1843.92 h35; Top Overlay "B0" at 1282.95,1743.9 h35; Top Overlay "B1" at 1282.95,1643.87 h35; Top Overlay "B10" at 1282.95,1543.85 h35; Top Overlay "B11" at 1282.95,1443.82 h35; Top Overlay "B12" at 1282.95,1343.79 h35; Top Overlay "B13" at 1282.95,1243.77 h35; Top Overlay "B14" at 1282.95,1143.74 h35; Top Overlay "B15" at 1282.95,1043.72 h35; Top Overlay "A8" at 1282.95,943.69 h35; Top Overlay "A11" at 1282.95,843.67 h35; Top Overlay "A12" at 1282.95,743.64 h35; Top Overlay "G" at 1282.95,643.61 h35; Top Overlay "3V3" at 1274.97,543.36 h35; Top Overlay "B4" at 2665.66,845.36 h35; Top Overlay "B5" at 2665.66,943.36 h35; Top Overlay "B6" at 2665.66,1045.36 h35; Top Overlay "B7" at 2665.66,1148.36 h35; Top Overlay "A15" at 2636.5,1250.36 h35; Top Overlay "C13" at 2636.5,1348.36 h35; Top Overlay "A1" at 2677.32,1547.36 h35; Top Overlay "A2" at 2665.66,1644.36 h35; Top Overlay "A3" at 2665.66,1748.36 h35; Top Overlay "A4" at 2665.66,1841.36 h35; Top Overlay "A5" at 2665.66,1943.36 h35; Top Overlay "A0" at 2665.66,1451.36 h35; Top Overlay "5V" at 2665.66,543.36 h35; Top Overlay "G" at 2700.65,643.15 h35; Top Overlay "B3" at 2665.66,742.93 h35